# Altium PCB 计数器24.pcbdoc
Units mil, origin at the board's own origin, x right, y up, seen from the top; angles counter-clockwise.
Board outline 5010 x 4350 mil, 2 copper layers (Top Layer, Bottom Layer); 36 components, 66 nets, 197 pads, 0 vias.
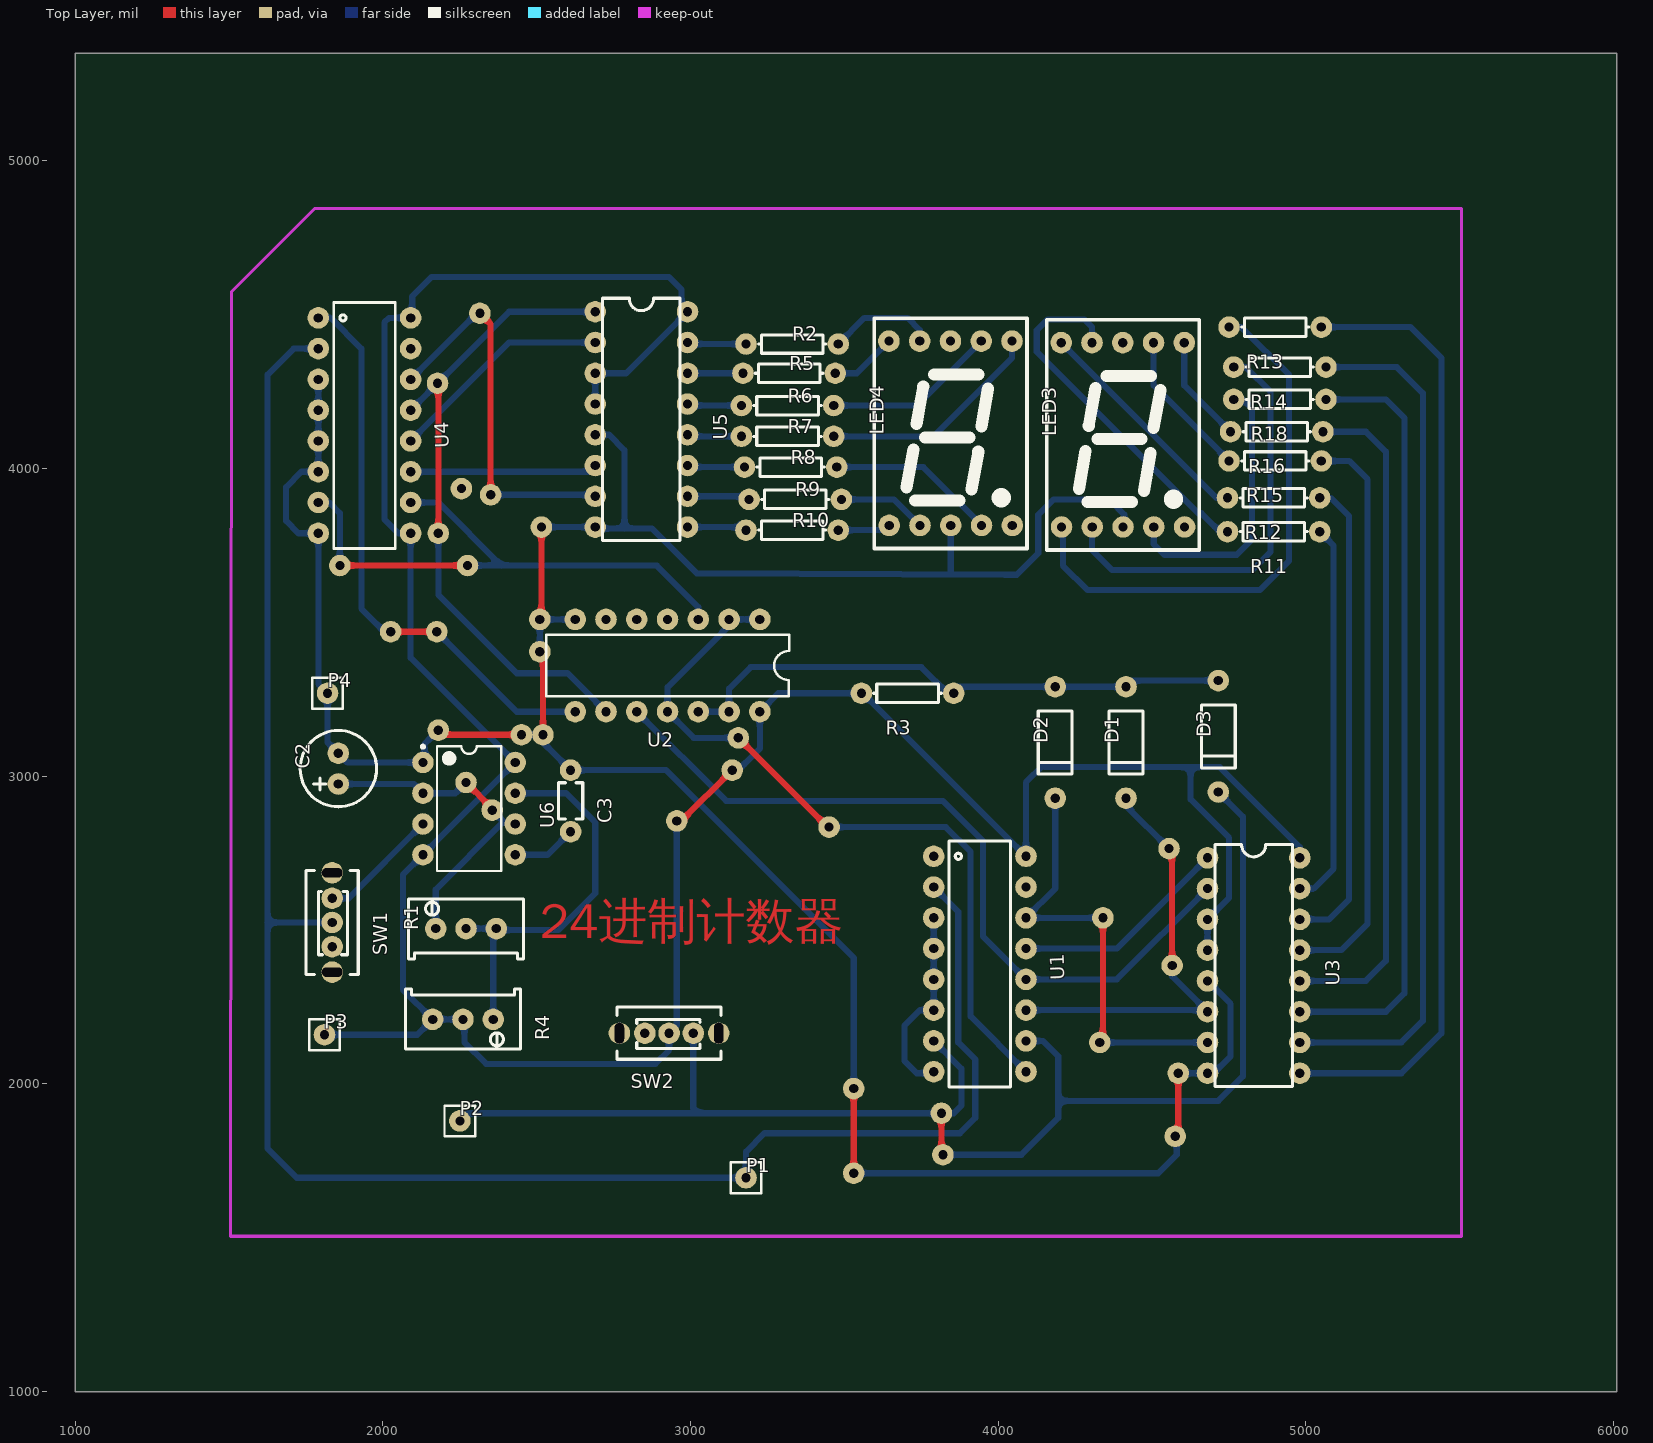
[diagram p0: Top Layer view]
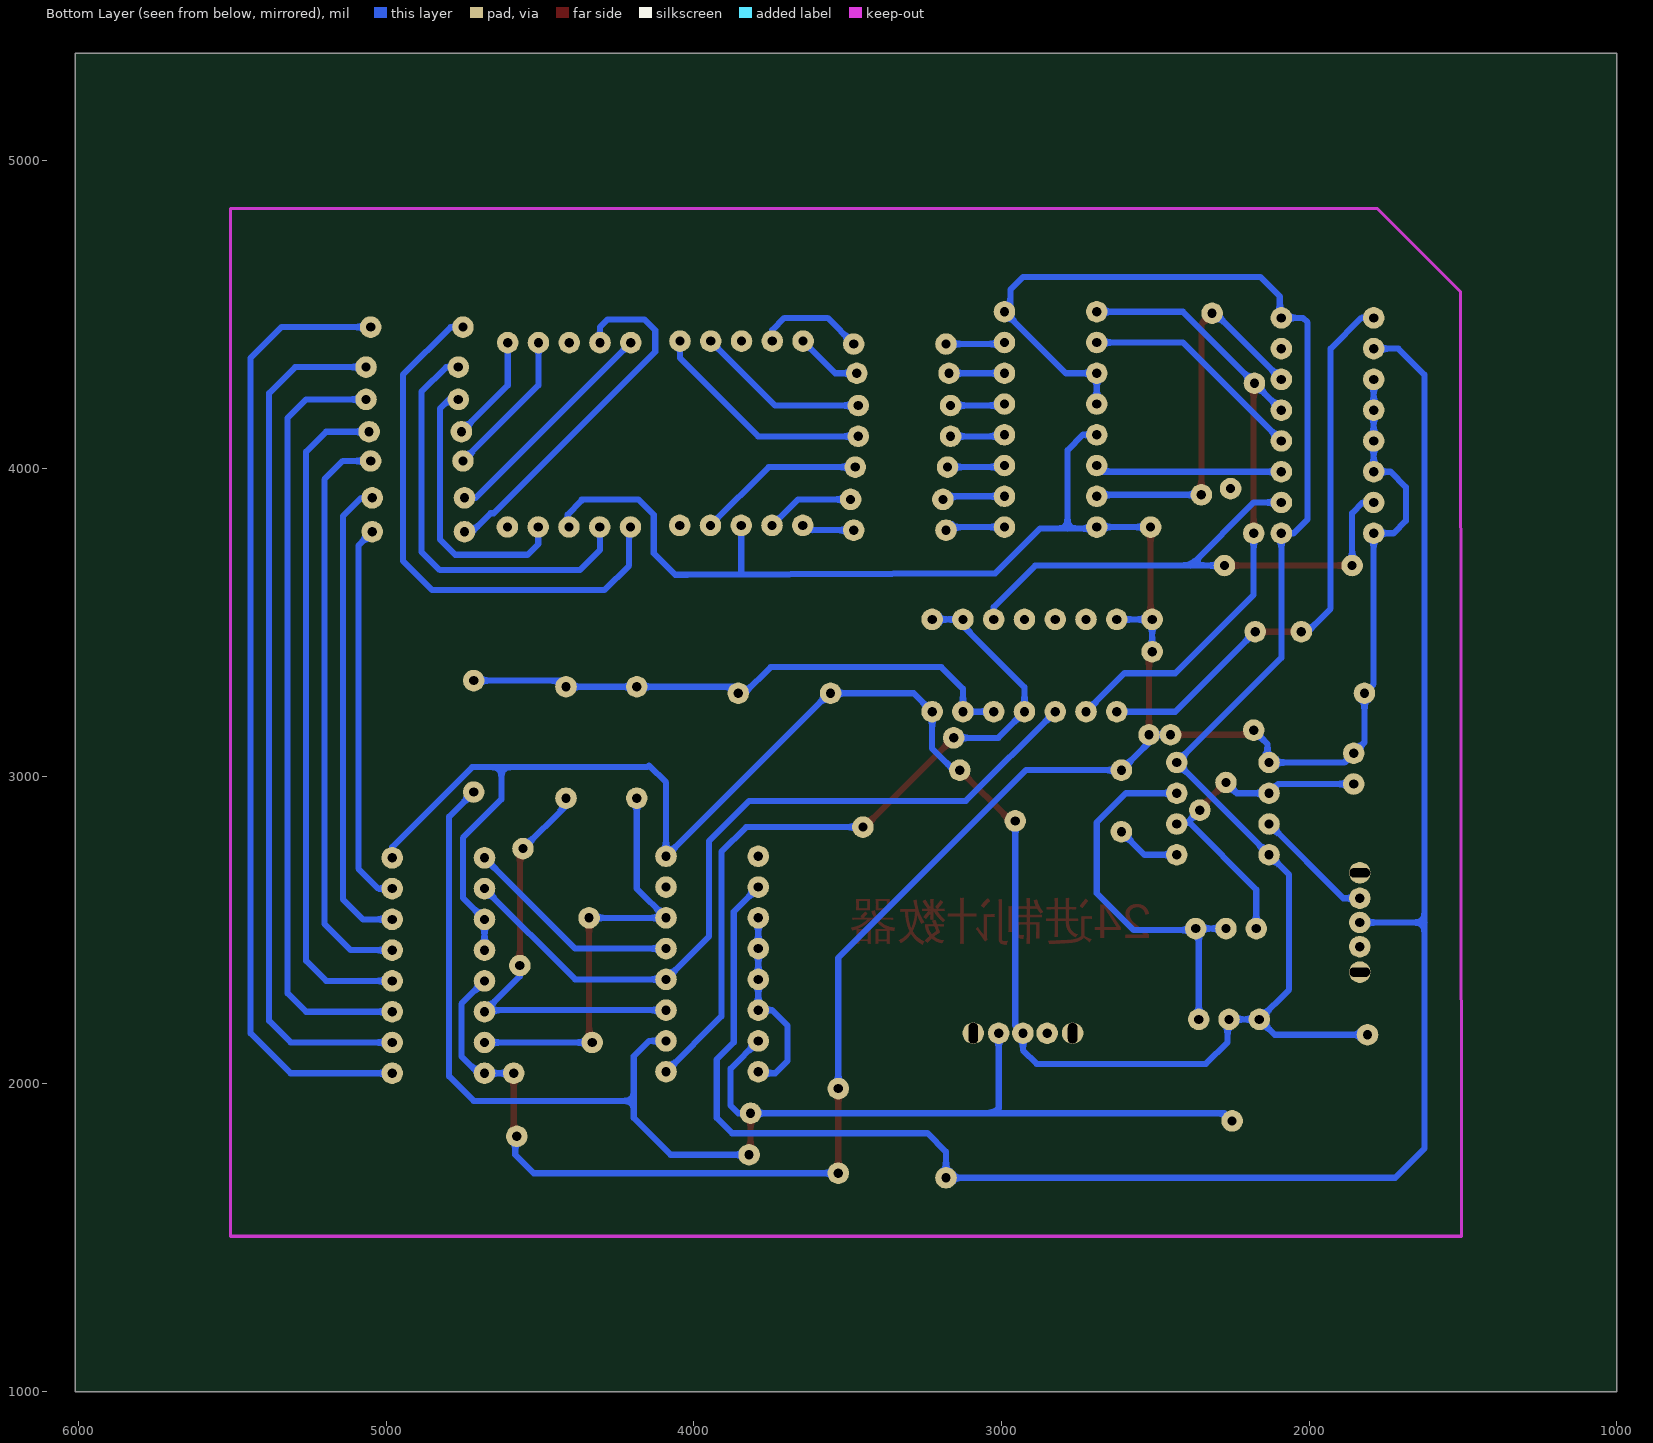
[diagram p1: Bottom Layer view, seen from below]

## Layer stack, top to bottom
Top Solder: solder mask 0.4, Solder Resist, Dk 3.5
Top Layer: signal copper 1.4
Dielectric1: dielectric 12.6, FR-4, Dk 4.8
Bottom Layer: signal copper 1.4
Bottom Solder: solder mask 0.4, Solder Resist, Dk 3.5

## Board outline
6010,1000 1000,1000 1000,5350 6010,5350

## Design rules (kind name [scope] priority, off if disabled: settings)
Clearance [All] p1: gap=10
PolygonConnect [All] p1: connectstyle=Relief reliefconductorwidth=10 reliefentries=4 polygonreliefangle="90 Angle" airgapwidth=10
RoutingVias [All] p1: holewidth=28 width=50 viastyle="Through Hole" minholewidth=28 minwidth=50 maxholewidth=28 maxwidth=50
SolderMaskExpansion [All] p1: expansion=4
Width [All] p1: maxlimit=10 minlimit=10 preferedwidth=10
30 further rules are at their usual default settings.

## Components (designator, comment, footprint, x,y, rotation, side; value= is the part's Value field where it differs from the comment)
C2 "10uf" CAP-TH_BD6.3-P2.50-D1.0-FD 1855,3025 r90 top
C3 "1uf" CAP-TH_L3.0-W2.0-P5.08-D0.7 2610,2920 r270 top
D1 "1N4007" DO-41_BD2.4-L4.7-P8.70-D0.9-RD 4415,3110 r90 top
D2 "1N4007" DO-41_BD2.4-L4.7-P8.70-D0.9-RD 4185,3110 r90 top
D3 "1N4007" DO-41_BD2.4-L4.7-P8.70-D0.9-RD 4715,3130 r90 top
LED3 "FJ5161BH" LEDSEG_1_0.56_ANODE 4405,4110 r90 top
LED4 "FJ5161BH" LEDSEG_1_0.56_ANODE 3845,4115 r90 top
P1 "方波" HDR-1X1/2.54 3180,1695 r0 top
P2 "使能" HDR-1X1/2.54 2250,1880 r0 top
P3 "vcc" HDR-1X1/2.54 1810,2160 r0 top
P4 "end" HDR-1X1/2.54 1820,3270 r0 top
R1 "500" RES-ADJ-TH_3P-L9.5-W4.85-P2.50-BL-BS 2270,2505 r90 top
R2 "1k" AXIAL-0.3 3330,4405 r0 top
R3 "1k" AXIAL-0.3 3705,3270 r180 top
R4 "500" RES-ADJ-TH_3P-L9.5-W4.85-P2.50-BL-BS 2260,2210 r270 top
R5 "1k" AXIAL-0.3 3320,4310 r0 top
R6 "1k" AXIAL-0.3 3315,4205 r0 top
R7 "1k" AXIAL-0.3 3315,4105 r0 top
R8 "1k" AXIAL-0.3 3325,4005 r0 top
R9 "1k" AXIAL-0.3 3340,3900 r0 top
R10 "1k" AXIAL-0.3 3330,3800 r0 top
R11 "1k" AXIAL-0.3 4895,3795 r180 top
R12 "1k" AXIAL-0.3 4895,3905 r180 top
R13 "1k" AXIAL-0.3 4900,4460 r180 top
R14 "1k" AXIAL-0.3 4915,4330 r180 top
R15 "1k" AXIAL-0.3 4900,4025 r180 top
R16 "1k" AXIAL-0.3 4905,4120 r180 top
R18 "1k" AXIAL-0.3 4915,4225 r180 top
SW1 "SLD-12-501" SW-TH_SLD-12-501 1835,2525 r270 top
SW2 "SLD-12-501" SW-TH_SLD-12-501 2930,2165 r180 top
U1 "74HC161N" DIP16 3940,2390 r270 top
U2 "SN74HC00N" DIP-14_L20.0-W7.6-P2.54-LS7.6-BL 2925,3360 r180 top
U3 "CD4511BE" DIP-16_L19.8-W6.5-P2.54-LS7.6-BL 4830,2385 r270 top
U4 "74HC161N" DIP16 1940,4140 r270 top
U5 "CD4511BE" DIP-16_L19.8-W6.5-P2.54-LS7.6-BL 2840,4160 r270 top
U6 "NE555P" DIP-8_L9.8-W6.6-P2.54-LS7.6-BL 2280,2895 r270 top

## Footprints (in the part's own frame and the unit in brackets; to place one, negate y for a bottom-side part, rotate by r counter-clockwise, add the part's x,y. Pads: shape width x height; smd on the part's side, far side on the other; paste and mask are expansions set on the pad)
AXIAL-0.3 [mil]
  round 70 hole 30: 1(-150,0) 2(150,0)
  silkscreen extent -110,-30 110,30
CAP-TH_BD6.3-P2.50-D1.0-FD [mil]
  round 70 hole 30: 1(-50,0) 2(50,0)
  silkscreen extent -124,-124 124,124
CAP-TH_L3.0-W2.0-P5.08-D0.7 [mil]
  round 70 hole 30: 1(-100,0) 2(100,0)
  silkscreen extent -59,-39 59,39
DIP16 [mil]
  round 70 hole 30: 1(-350,-150) 2(-250,-150) 3(-150,-150) 4(-50,-150) 5(50,-150) 6(150,-150) 7(250,-150) 8(350,-150) 9(350,150) 10(250,150) 11(150,150) 12(50,150) 13(-50,150) 14(-150,150) 15(-250,150) 16(-350,150)
  silkscreen extent -400,-100 400,100
DIP-8_L9.8-W6.6-P2.54-LS7.6-BL [mil]
  round 70 hole 30: 1(-150,-150) 2(-50,-150) 3(50,-150) 4(150,-150) 5(150,150) 6(50,150) 7(-50,150) 8(-150,150)
  silkscreen extent -206,-155 203,104
DIP-14_L20.0-W7.6-P2.54-LS7.6-BL [mil]
  round 70 hole 30: 1(-300,-150) 2(-200,-150) 3(-100,-150) 4(0,-150) 5(100,-150) 6(200,-150) 7(300,-150) 8(300,150) 9(200,150) 10(100,150) 11(0,150) 12(-100,150) 13(-200,150) 14(-300,150)
  silkscreen extent -395,-99 394,100
DIP-16_L19.8-W6.5-P2.54-LS7.6-BL [mil]
  round 70 hole 30: 1(-350,-150) 2(-250,-150) 3(-150,-150) 4(-50,-150) 5(50,-150) 6(150,-150) 7(250,-150) 8(350,-150) 9(350,150) 10(250,150) 11(150,150) 12(50,150) 13(-50,150) 14(-150,150) 15(-250,150) 16(-350,150)
  silkscreen extent -394,-126 394,126
DO-41_BD2.4-L4.7-P8.70-D0.9-RD [mil]
  round 70 hole 30: 1(-181.1,0) 2(181.1,0)
  silkscreen extent -102,-55 102,55
HDR-1X1/2.54 [mil]
  round 70 hole 30: 1(0,0)
  silkscreen extent -50,-50 50,50
LEDSEG_1_0.56_ANODE [mil]
  round 70 hole 30: 1(-299.5,199.5) 2(-299.5,99.5) 3(-299.5,-0.5) 4(-299.5,-100.5) 5(-299.5,-200.5) 6(299.5,-199.5) 7(299.5,-99.5) 8(299.5,0.5) 9(299.5,100.5) 10(299.5,200.5)
  silkscreen extent -375,-248 374,248
RES-ADJ-TH_3P-L9.5-W4.85-P2.50-BL-BS [mil]
  round 70 hole 30: 1(0,98.42) 2(0,-0.01) 3(0,-98.42)
  silkscreen extent -98,-187 96,187
SW-TH_SLD-12-501 [mil]
  round 70 hole 30: 1(-78.74,0) 2(0,0) 3(78.74,0)
  round 70 hole 30 slot 66.93 at 90 deg: 4(161.42,0) 5(-161.42,0)
  silkscreen extent -169,-85 169,85

## Free pads (board coordinates)
  round 70 hole 30: 2(3135,3020) 3(2955,2855) 4(2025,3470) 5(2175,3470) 6(2180,3790) 7(2180,3150) 8(2520,3135) 9(2510,3405) 20(3155,3125) 21(3450,2835) 22(2315,4505) 23(2350,3915) 25(3820,1770) 26(4330,2135) 27(4340,2540) 28(4555,2765) 29(4565,2385) 39(3530,1985) 42(3530,1710) 43(4575,1830) 44(4585,2035) 50(2450,3135) 52(2177.5,4277.5) 53(2510,3510) 55(2515,3810) 57(3815,1905) 58(2355,2890) 59(2270,2980) 60(2255,3935) 65(2275,3685) 66(1860,3685)

## Nets (pads, with @x,y where several pads share a name; then routed paths per layer and width w, separated by ;. In a path a pad name is that pad's centre, name@x,y a point inside that pad or via, vN(x,y) a via of type N, cw(c..) or ccw(c..) an arc to the next point about the centre after c; other vN are vias at no path point)
C2_1: C2.1 pad.58 pad.59 R1.1 U6.2 U6.6 | length 1131.2
  Top Layer w20: pad.59 2355,2895 pad.58
  Bottom Layer w20: C2.1 2100,2975 U6.2 2235,2945 pad.59 ; R1.1 2171.57,2631.57 2390,2850 U6.6@2425,2850 ; pad.58 2395,2850 U6.6@2425,2850 ; U6.6 U6.6@2425,2850
C3_2: C3.2 U6.5 | length 211.1
  Bottom Layer w20: U6.5 2535,2745 C3.2
GND: C2.2 C3.1 LED3.3 LED4.3 P4.1 pad.7 pad.8 pad.9 pad.39 pad.42 pad.43 pad.44 pad.50 pad.53 pad.55 U2.7 U3.5 U3.8 U4.3 U4.4 U4.5 U4.6 U4.8 U5.5 U5.8 U6.1 | length 9542.7
  Top Layer w20: pad.7 2195,3135 pad.50 ; pad.9 2520,3395 pad.8 ; pad.53 2515,3515 pad.55 ; pad.42 pad.39 ; pad.43 4585,1840 pad.44
  Bottom Layer w20: U4.3 U4.4 U4.5 U4.6 1735,3990 1685,3940 1685,3830 1725,3790 U4.8 1790,3300 P4.1 1820,3110 C2.2 1885,3045 U6.1 2135,3050 2135,3105 pad.7 ; pad.50 pad.8 2520,3110 C3.1 2920,3020 3530,2410 pad.39 pad.39@3530,1970 ; pad.53@2500,3510 pad.53 ; pad.9 pad.53 ; pad.55 U5.8 2695,3805 2785,3805 ; U2.7 pad.53 ; U5.5 2735,4110 2785,4060 2785,3805 ; pad.42 4520,1710 4580,1770 4580,1825 pad.43 ; 3845.5,3660 LED4.3 ; LED3.3 4410,3815 4410,3850 4365,3895 4365,3900 4180,3900 4130,3850 4130,3725 4060,3655 4020,3655 3020,3660 2875,3805 2785,3805 ; pad.44 U3.8 4700,2035 4755,2090 4755,2260 U3.5
LED3_5: LED3.5
LED3_8: LED3.8
LED4_5: LED4.5
LED4_8: LED4.8
P1_1: P1.1 SW1.2 U1.2 U4.2 | length 6218.7
  Bottom Layer w20: 1625,2542.7 1625,1790 1720,1695 P1.1 3180,1780 3240,1840 3875,1840 3925,1890 3925,2080 3870,2135 3870,2560 U1.2 ; U4.2 1710,4390 1625,4305 1625,2525 SW1.2
R2_2: LED4.9 R2.2 | length 352.5
  Bottom Layer w20: R2.2 3565,4490 3705,4490 3745,4450 3745,4415 LED4.9
R4_1: R1.2 R1.3 R4.1 U6.7 | length 1300.3
  Bottom Layer w20: R1.2 R1.3 ; R4.1 2358.43,2495 R1.3 ; U6.7 2595,2945 2690,2850 2690,2620 2570,2500 2373.42,2500 R1.3
R5_2: LED4.10 R5.2 | length 217.8
  Bottom Layer w20: R5.2 3540,4310 LED4.10
R6_2: LED4.7 R6.2 | length 566.3
  Bottom Layer w20: R6.2 3735,4205 LED4.7
R7_2: LED4.6 R7.2 | length 740.3
  Bottom Layer w20: R7.2 3790,4105 4045,4360 4045,4414 LED4.6
R8_2: LED4.4 R8.2 | length 549
  Bottom Layer w20: R8.2 3756,4005 LED4.4
R9_2: LED4.2 R9.2 | length 290.5
  Bottom Layer w20: R9.2 3661,3900 LED4.2
R10_2: LED4.1 R10.2 | length 171.9
  Bottom Layer w20: R10.2 3630,3800 LED4.1
R11_2: LED3.9 R11.2 | length 1187.9
  Bottom Layer w20: LED3.9 4305,4410 4305,4460 4280,4485 4160,4485 4125,4450 4125,4380 4650,3855 4660,3855 4720,3795 R11.2
R12_2: LED3.10 R12.2 | length 749.5
  Bottom Layer w20: LED3.10 4709,3905 R12.2
R13_2: LED3.1 R13.2 | length 1799.1
  Bottom Layer w20: LED3.1 4210,3806 4210,3685 4290,3605 4850,3605 4945,3700 4945,4305 4790,4460 R13.2
R14_2: LED3.2 R14.2 | length 1380.6
  Bottom Layer w20: LED3.2 4305,3810 4305,3735 4370,3670 4825,3670 4885,3730 4885,4250 4805,4330 R14.2
R15_2: LED3.7 R15.2 | length 486.2
  Bottom Layer w20: LED3.7 4504.5,4270.5 R15.2
R16_2: LED3.6 R16.2 | length 351.8
  Bottom Layer w20: LED3.6 4604.5,4270.5 R16.2
R18_2: LED3.4 R18.2 | length 908.3
  Bottom Layer w20: LED3.4 4505,3810 4505,3755 4540,3720 4775,3720 4825,3770 4825,4195 4795,4225 R18.2
S$48: 
SW1_1: SW1.1 U6.3 | length 394.9
  Bottom Layer w20: SW1.1 1888.74,2603.74 U6.3
SW1_3: SW1.3
SW1_4: SW1.4
SW1_5: SW1.5
SW2_3: SW2.3
SW2_4: SW2.4
SW2_5: SW2.5
U1_1: U1.1
U1_3: U1.3 U1.4 U1.5 U1.6 U1.8 | length 644.4
  Bottom Layer w20: U1.8 3785,2035 3735,2035 3695,2075 3695,2190 3745,2240 U1.6 U1.5 U1.4 U1.3
U1_7: D3.1 P2.1 pad.25 pad.57 SW2.1 U1.7 U1.10 | length 4642.4
  Top Layer w20: pad.57 3815,1775 pad.25
  Bottom Layer w20: P2.1 2275,1905 pad.57 3855,1905 3880,1930 3880,2050 U1.7 ; SW2.1 3008.74,1921.26 3025,1905 ; pad.25 4075,1770 4195,1890 4195,2090 4145,2140 U1.10 ; 4195,1945 4715,1945 4795,2025 4795,2868.9 D3.1
U1_9: pad.20 pad.21 U1.9 U2.1 U2.2 U2.11 | length 2460.9
  Top Layer w20: pad.20 3445,2835 pad.21
  Bottom Layer w20: pad.20@3170,3125 pad.20 3010,3125 U2.11 2925,3290 3125,3490 U2.2 U2.1 ; pad.21 3830,2835 3910,2755 3910,2220 U1.9
U1_11: D1.1 pad.28 pad.29 U1.11 U3.6 | length 1405.7
  Top Layer w20: pad.28 4565,2755 pad.29
  Bottom Layer w20: U1.11 4675,2240 U3.6 4565,2350 pad.29 pad.29@4565,2395 ; D1.1 4415,2905 pad.28
U1_12: U1.12 U2.10 U3.2 | length 2519.2
  Bottom Layer w20: U2.10 3115,2920 3820,2920 3950,2790 3950,2480 U1.12 4385,2340 U3.2
U1_13: U1.13 U3.1 | length 712.2
  Bottom Layer w20: U1.13 4385,2440 U3.1
U1_14: D2.1 pad.26 pad.27 U1.14 U3.7 | length 1457.4
  Top Layer w20: pad.26 4340,2145 pad.27
  Bottom Layer w20: D2.1 4185,2635 U1.14 pad.27 pad.27@4350,2540 ; pad.26@4320,2135 pad.26 U3.7
U1_15: U1.15
U2_3: pad.65 pad.66 U2.3 U4.7 U4.10 | length 1905.3
  Top Layer w20: pad.66 pad.65
  Bottom Layer w20: U4.7 1825,3890 1860,3855 pad.66 ; U4.10 2180,3890 2385,3685 ; pad.65@2265,3685 pad.65 2385,3685 ; U2.3 3025,3550 2890,3685 2385,3685
U2_4: U2.4
U2_5: U2.5
U2_6: U2.6
U2_8: pad.4 pad.5 U2.8 U4.1 | length 1874.3
  Top Layer w20: pad.4 pad.5
  Bottom Layer w20: U4.1 1830,4490 1930,4390 1930,3545 2005,3470 pad.4 ; pad.5@2165,3480 pad.5 2435,3210 U2.8
U2_9: pad.6 pad.52 U2.9 U4.13 U5.1 | length 2123.5
  Top Layer w20: pad.52 2180,4275 pad.6
  Bottom Layer w20: U4.13 pad.52 2410,4510 U5.1 ; pad.6 2180,3590 2435,3335 2600,3335 U2.9
U2_12: D1.2 D2.2 D3.2 R3.1 U2.12 U2.13 | length 1866.2
  Bottom Layer w20: U2.12 U2.13 3125,3285 3195,3355 3750,3355 R3.1@3835,3270 ; R3.1 R3.1@3835,3270 ; D3.2 4435,3311.1 D1.2 D2.2 3856.1,3291.1 R3.1@3835,3270
U3_9: R13.1 U3.9 | length 3140.3
  Bottom Layer w20: U3.9 5310,2035 5440,2165 5440,4360 5340,4460 R13.1
U3_10: R14.1 U3.10 | length 2819.2
  Bottom Layer w20: U3.10 5310,2135 5380,2205 5380,4245 5295,4330 R14.1
U3_11: R18.1 U3.11 | length 2514.7
  Bottom Layer w20: U3.11 5260,2235 5320,2295 5320,4165 5260,4225 R18.1
U3_12: R16.1 U3.12 | length 2193.8
  Bottom Layer w20: U3.12 5195,2335 5260,2400 5260,4055 5195,4120 R16.1
U3_13: R15.1 U3.13 | length 1875.1
  Bottom Layer w20: U3.13 5115,2435 5200,2520 5200,3965 5140,4025 R15.1
U3_14: R12.1 U3.14 | length 1551.8
  Bottom Layer w20: U3.14 5075,2535 5140,2600 5140,3845 5080,3905 R12.1
U3_15: R11.1 U3.15 | length 1250.6
  Bottom Layer w20: U3.15 5025,2635 5090,2700 5090,3750 R11.1
U4_11: U4.11 U5.6 | length 608.3
  Bottom Layer w20: U4.11 2670,3990 U5.6
U4_12: U4.12 U5.2 | length 732.5
  Bottom Layer w20: U4.12 2410,4410 U5.2
U4_14: pad.22 pad.23 U4.14 U5.7 | length 1270.6
  Top Layer w20: pad.22 2350,4470 pad.23
  Bottom Layer w20: U4.14 2305,4505 pad.22 ; pad.23@2340,3915 pad.23 2685,3915 U5.7
U4_15: U4.15
U5_9: R10.1 U5.9 | length 222.4
  Bottom Layer w20: U5.9 3170,3810 R10.1 R10.1@3160,3820
U5_10: R9.1 U5.10 | length 225.4
  Bottom Layer w20: U5.10 3180,3910 R9.1 R9.1@3175,3915
U5_11: R8.1 U5.11 | length 187.1
  Bottom Layer w20: U5.11 2995,4005 R8.1
U5_12: R7.1 U5.12 | length 184.1
  Bottom Layer w20: U5.12 2995,4105 R7.1 R7.1@3160,4100
U5_13: R6.1 U5.13 | length 180
  Bottom Layer w20: U5.13 2990,4205 R6.1
U5_14: R5.1 U5.14 | length 180
  Bottom Layer w20: U5.14 R5.1
U5_15: R2.1 U5.15 | length 192.1
  Bottom Layer w20: U5.15 2995,4405 R2.1
VCC: P3.1 pad.2 pad.3 R3.2 R4.2 R4.3 SW2.2 U1.16 U2.14 U3.3 U3.4 U3.16 U4.9 U4.16 U5.3 U5.4 U5.16 U6.4 U6.8 | length 9880.5
  Top Layer w20: pad.3 2970,2855 pad.2
  Bottom Layer w20: P3.1 2111.6,2160 R4.3 ; U4.16@2070,4487.5 2095,4487.5 2095,4560 2157.5,4622.5 2930,4622.5 2970,4582.5 U5.16@2970,4507.5 ; U4.16 2020,4490 2005,4475 2005,3835 2050,3790 U4.9 2090,3385 U6.8 U6.4 2065,2680 2065,2306.57 R4.3 ; U5.4 U5.3 2790,4310 U5.16 ; pad.3 2955,2190 SW2.2 2930,2110 2885,2065 2335,2065 2265,2135 2265,2205 R4.2 R4.3 ; pad.2@3125,3020 pad.2 3155,3020 3225,3090 U2.14 3285,3270 R3.2 3560,3270 U1.16 4090,2980 4145,3035 4150,3030 4720,3030 4980,2770 ; 4625,3030 4625,2925 4750,2800 4750,2605 U3.3 U3.4

## Keep-outs
Keep-Out Layer:
  lines w10: 1505,1505 5505,1505 5505,4845 1777.5,4845 1607.5,4675 1507.5,4575 1505,1505

## Other copper
Top Layer:
  text "24进制计数器" at 2510,2435 h200

## Silkscreen, mask and mechanical layers (free items; w line width, h text height)
Document:
  lines w0.1: 3504,3174 3506,3176